# Altium PCB djb_v2_rigid_left.PcbDoc
Units mil, origin at the board's own origin, x right, y up, seen from the top; angles counter-clockwise.
Board outline 1141.73 x 575.79 mil, 4 copper layers (Top Layer, Inner 1, Inner 2, Bottom Layer), stack 23.234 mil thick; 69 components, 44 nets, 250 pads, 92 vias.
Unrouted connection lines stored in the file: 12.
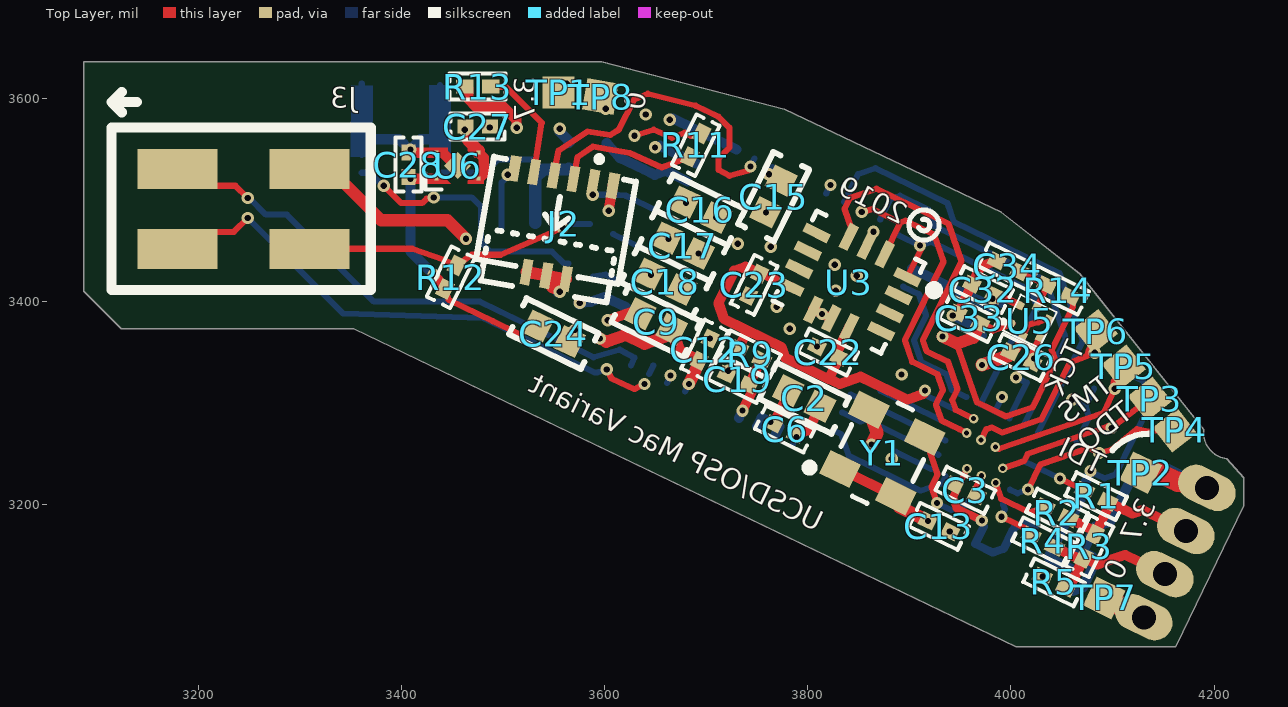
[diagram p0: Top Layer view]
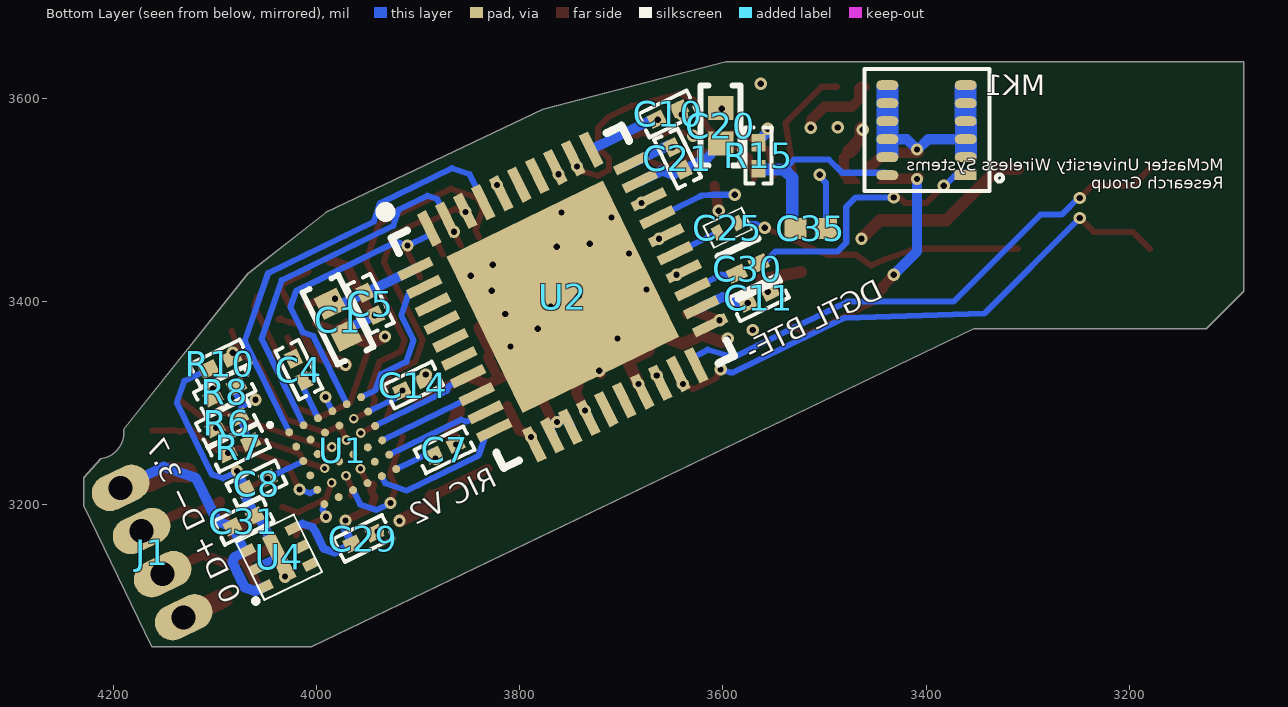
[diagram p1: Bottom Layer view, seen from below]
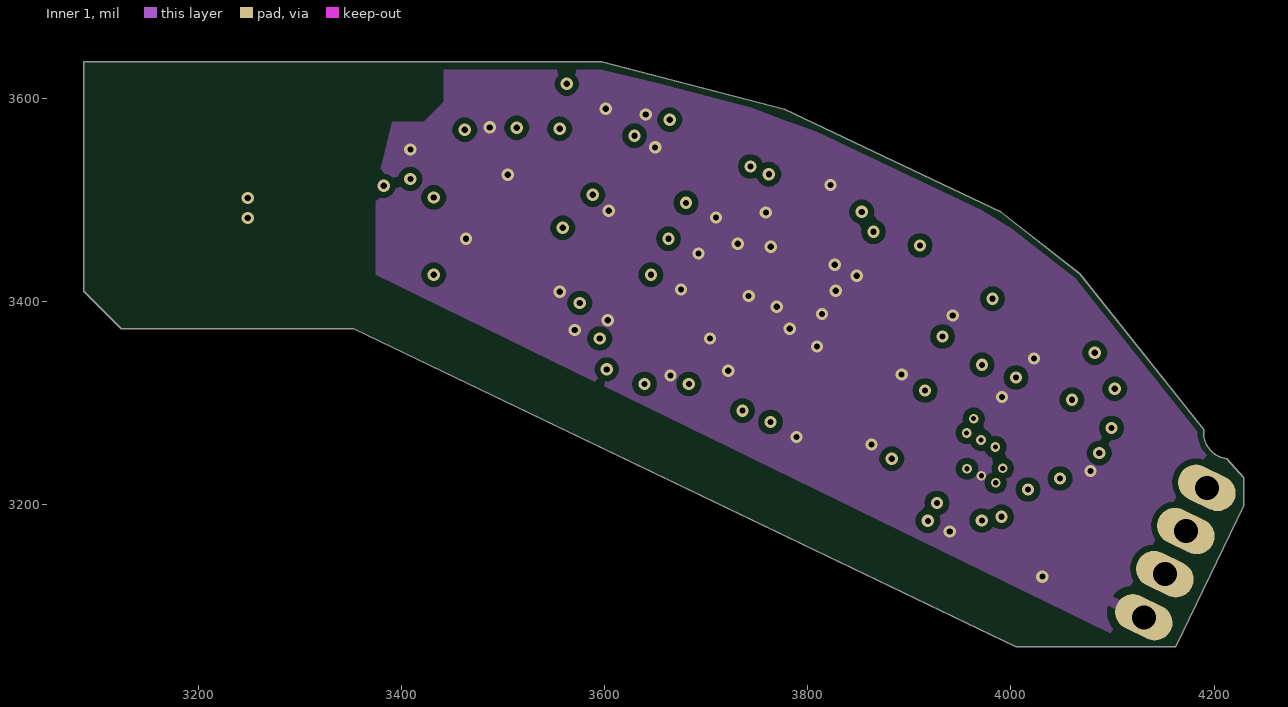
[diagram p2: Inner 1]
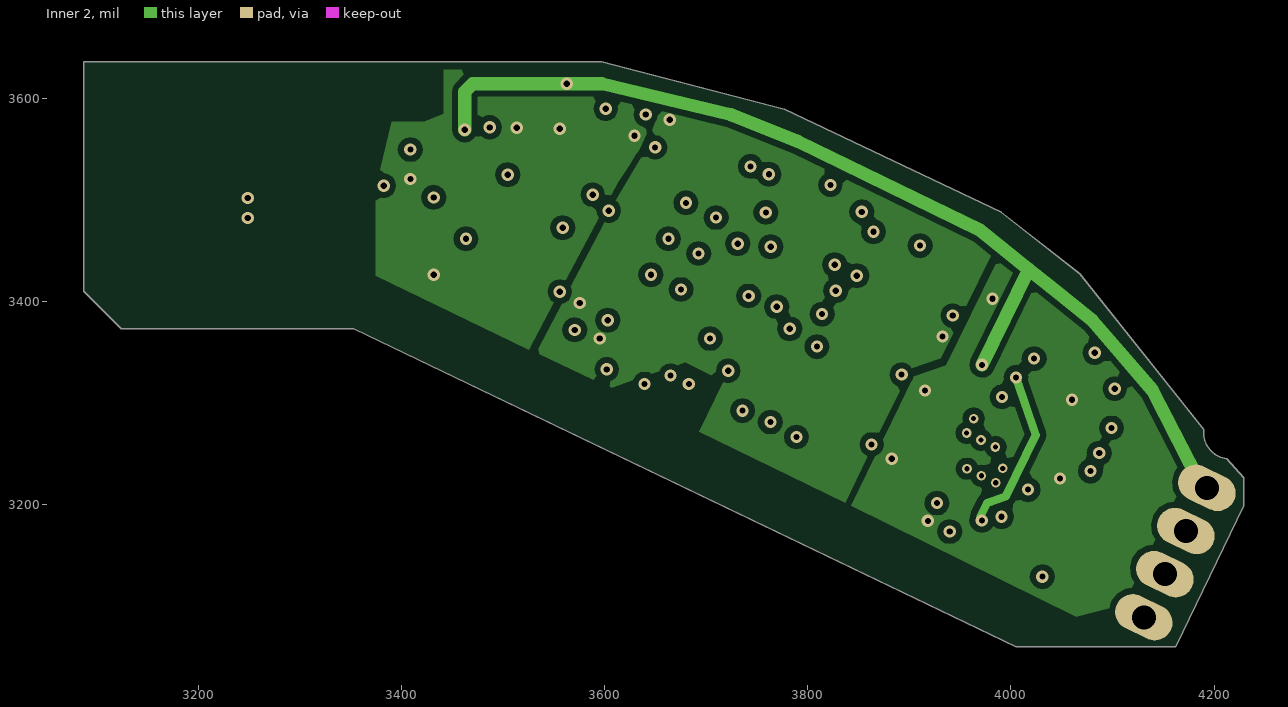
[diagram p3: Inner 2]

## Layer stack, top to bottom
Top Solder: solder mask 0.4, Solder Resist, Dk 3.5
Top Layer: signal copper 1.4
Dielectric 1: prepreg 2.8, PP-006, Dk 4.1
Inner 1: signal copper 1.4169
Dielectric 3: core 12, Core-029, Dk 4.7
Inner 2: signal copper 1.4169
Dielectric 2: prepreg 2.8, PP-006, Dk 4.1
Bottom Layer: signal copper 1.4
Bottom Solder: solder mask 0.4, Solder Resist, Dk 3.5

## Board outline
4229.18,3198.81 4229.18,3226.37 4212.45,3245.07 cw(c4215.52,3270.64) 4189.94,3273.72 4067.76,3427.15 3990.75,3487.49 3777.07,3588.89 3597.17,3635.81 3087.45,3635.81 3087.45,3409.86 3124.29,3373.02 3353.2,3373.02 4005.07,3060.03 4162.25,3060.03

## Design rules (kind name [scope] priority, off if disabled: settings)
BoardOutlineClearance BoardOutlineClearance_Silk [OnLayer('Top Overlay') Or OnLayer('Bottom Overlay')] p1: gap=0 ignorepadtopadclearanceinfootprint=FALSE
BoardOutlineClearance BoardOutlineClearance_Normal [All] p2: gap=6 ignorepadtopadclearanceinfootprint=FALSE
Clearance [All] p1: gap=6 ignorepadtopadclearanceinfootprint=FALSE
ComponentClearance [All] p1: gap=0 collisioncheckmode=3 verticalgap=0 showdistances=FALSE
DiffPairsRouting [All] p1: maxlimit=10 minlimit=6 mostfreqgap=10 toplayer_minwidth=6 toplayer_maxwidth=15 toplayer_prefwidth=10 midlayer1_minwidth=6 midlayer1_maxwidth=15 midlayer1_prefwidth=10 midlayer2_minwidth=6 midlayer2_maxwidth=15 midlayer2_prefwidth=10 bottomlayer_minwidth=6 bottomlayer_maxwidth=15 bottomlayer_prefwidth=10 maxuncoupledlength=500
MinimumSolderMaskSliver [All] p1: minsoldermaskwidth=3
PasteMaskExpansion [All] p1 off: expansion=0
PlaneClearance [All] p1: clearance=10
PlaneConnect PlaneConnect_Via [IsVia] p1: planeconnectstyle=Direct reliefexpansion=10 reliefentries=4 reliefconductorwidth=10 reliefairgap=8
PlaneConnect PlaneConnect_Normal [All] p2: pad.planeconnectstyle=Relief pad.reliefexpansion=10 pad.reliefentries=4 pad.reliefconductorwidth=10 pad.reliefairgap=8 via.planeconnectstyle=Direct via.reliefexpansion=10 via.reliefentries=4 via.reliefconductorwidth=10 via.reliefairgap=8
PolygonConnect PolygonConnect_Normal [All] p1: thpad.connectstyle=Relief thpad.reliefconductorwidth=10 thpad.reliefentries=4 thpad.polygonreliefangle="90 Angle" thpad.airgapwidth=8 smdpad.connectstyle=Relief smdpad.reliefconductorwidth=10 smdpad.reliefentries=4 smdpad.polygonreliefangle="90 Angle" smdpad.airgapwidth=8 via.connectstyle=Direct via.reliefconductorwidth=10 via.reliefentries=4 via.polygonreliefangle="90 Angle" via.airgapwidth=10
RoutingVias [All] p1: holewidth=6 width=12 viastyle="Through Hole" minholewidth=5 minwidth=9.5 maxholewidth=50 maxwidth=100
SilkToSilkClearance [All] p1: silktosilkclearance=-1000
SilkToSolderMaskClearance [IsPad] p1: minsilkscreentomaskgap=-1000 clearancetoexposedcopper=TRUE
SolderMaskExpansion [All] p1 off: expansion=4 istentingtop=FALSE
Width [All] p1: maxlimit=100 minlimit=6 preferedwidth=6
22 further rules are at their usual default settings.

## Components (designator, comment, footprint, x,y, rotation, side; value= is the part's Value field where it differs from the comment)
C1 "10uF" "CAP 0402/1005" 3978.89,3381.9 r64 bottom
C2 "10uF" "CAP 0402/1005" 3796.53,3304.39 r154 top
C3 "0.10uF" "CAP 0201/0603" 3955.28,3214.05 r334 top
C4 "0.10uF" "CAP 0201/0603" 4017.49,3332.63 r244 bottom
C5 "0.10uF" "CAP 0201/0603" 3947.04,3397.44 r244 bottom
C6 "0.10uF" "CAP 0201/0603" 3777.46,3274.27 r334 top
C7 "0.10uF" "CAP 0201/0603" 3873.89,3253.74 r154 bottom
C8 "0.10uF" "CAP 0201/0603" 4059.1,3220.36 r154 bottom
C9 "10uF" "CAP 0402/1005" 3650.79,3380.08 r154 top
C10 "0.10uF" "CAP 0201/0603" 3654.05,3584.36 r334 bottom
C11 "0.10uF" "CAP 0201/0603" 3564.57,3403.53 r334 bottom
C12 "0.10uF" "CAP 0201/0603" 3698.6,3352.38 r244 top
C13 "0.10uF" "CAP 0201/0603" 3929.21,3178.58 r154 top
C14 "0.10uF" "CAP 0201/0603" 3904.95,3317.44 r154 bottom
C15 "10uF" "CAP 0402/1005" 3766.4,3503.06 r244 top
C16 "10uF" "CAP 0402/1005" 3694.34,3490.02 r334 top
C17 "10uF" "CAP 0402/1005" 3677.08,3454.64 r334 top
C18 "10uF" "CAP 0402/1005" 3659.82,3419.25 r334 top
C19 "1uF" "CAP 0201/0603" 3731.2,3323.11 r334 top
C20 "10uF" "CAP 0402/1005" 3602.24,3572.82 r90 bottom
C21 "0.10uF" "CAP 0201/0603" 3644.54,3540.6 r244 bottom
C22 "0.10uF" "CAP 0201/0603" 3820.12,3350.06 r334 top
C23 "0.10uF" "CAP 0201/0603" 3747.27,3416.25 r64 top
C24 "10uF" "CAP 0402/1005" 3550.05,3368.1 r154 top
C25 "CL03A105KQ3CSNH" CL03A105KQ3CSNH 3595.32,3472.43 r334 bottom
C26 "1uF" "CAP 0201/0603" 4010.33,3344.89 r154 top
C27 "1uF" "CAP 0201/0603" 3475.24,3572.04 r180 top
C28 "1uF" "CAP 0201/0603" 3407.05,3534.44 r270 top
C29 "1uF" "CAP 0201/0603" 3953.98,3166.5 r334 bottom
C30 "GRM033R60J155ME14D" FP-GRM033-0_03-IPC_B 3575.54,3432.21 r155 bottom
C31 "1uF" "CAP 0201/0603" 4071.79,3183.5 r334 bottom
C32 "1uF" "CAP 0201/0603" 3972.7,3411.43 r334 top
C33 "1uF" "CAP 0201/0603" 3958.89,3383.12 r334 top
C34 "1uF" "CAP 0201/0603" 3997.12,3434.56 r334 top
C35 "CL03A104KQ3NNNC" CAPC0603X33X15ML03T05 3513.63,3471.7 r0 bottom
J1 "PIGTAIL" PIGTAIL 4161.89,3152.7 r64 bottom
J2 "FFC" HIROSE_FH58M-7S-0.25SHW-99 3554.97,3495.07 r350 top
J3 "M22-6550242R" M22-6550242R 3244.93,3491.08 r270 top
MK1 "VA1200AA" VA1200AA 3438.24,3524.11 r180 bottom
R1 "2k" "RES 0201/0603" 4083.87,3208.27 r154 top
R2 "100" "RES 0201/0603" 4045.29,3192.05 r154 top
R3 "115" "RES 0201/0603" 4077.31,3158.91 r64 top
R4 "100" "RES 0201/0603" 4031.49,3163.74 r154 top
R5 "2k" "RES 0201/0603" 4042.45,3123.35 r334 top
R6 "4.7k" "RES 0201/0603" 4088.44,3280.51 r154 bottom
R7 "4.7k" "RES 0201/0603" 4076.36,3255.74 r154 bottom
R8 "4.7k" "RES 0201/0603" 4090.4,3311.01 r154 bottom
R9 "1k" "RES 0201/0603" 3743.28,3347.88 r334 top
R10 "2.2k" "RES 0201/0603" 4094.91,3338.68 r154 bottom
R11 "1k" "RES 0201/0603" 3689.81,3553.68 r64 top
R12 "1k" "RES 0201/0603" 3448.67,3423.68 r244 top
R13 "1k" "RES 0201/0603" 3475.24,3611.21 r180 top
R14 "3k" "RES 0201/0603" 4046.66,3410.4 r154 top
R15 "1k" "RES 0201/0603" 3564.81,3543.29 r270 bottom
TP1 "TP_SMD_DJB" TP_SMD_DJB#1 3554.97,3605.3 r90 top
TP2 "TP_SMD_DJB" TP_SMD_DJB#1 4127.8,3231.29 r64 top
TP3 "TP_SMD_DJB" TP_SMD_DJB#2 4136.66,3304.12 r64 top
TP4 "TP_SMD_DJB" TP_SMD_DJB#2 4161.27,3272.98 r64 top
TP5 "TP_SMD_DJB" TP_SMD_DJB#2 4111.07,3335.62 r64 top
TP6 "TP_SMD_DJB" TP_SMD_DJB#2 4083.51,3370.6 r64 top
TP7 "TP_SMD_DJB" TP_SMD_DJB#1 4091.9,3107.99 r64 top
TP8 "TP_SMD_DJB" TP_SMD_DJB#3 3596.31,3601.37 r90 top
U1 "LCMXO3LF-1300E-XUWG36" BGA36_WLCS_25X25_MACHXO3 3974.26,3252.97 r244 bottom
U2 "ADAU1372" QFN40_LFCSP_WQ_6mmx6mm 3757.69,3404.37 r244 bottom
U3 "BMI160" LGA14R50P5X4_300X250X83 3840.57,3418.93 r154 top
U4 "MIC5367 LDO 1.2V" "LDO 1.2V" 4036.92,3147.95 r64 bottom
U5 "MIC5380/1-xxYFT" "06L FCSTSLP" 4018.79,3380.19 r334 top
U6 "MIC5504-1.8YMT" MICREL_DFN4 3455.56,3533.45 r90 top
Y1 "12.288 MHz" OSC_2.5X2.0MM 3831.82,3234.84 r64 top

## Footprints (in the part's own frame and the unit in brackets; to place one, negate y for a bottom-side part, rotate by r counter-clockwise, add the part's x,y. Pads: shape width x height; smd on the part's side, far side on the other; paste and mask are expansions set on the pad)
"06L FCSTSLP" [mm] "6-Pin 1mm x 1mm Thin MLF®   (FT)"
  oct 0.2x0.2 smd mask+0.01: 1(-0.4,-0.25)
  rect 0.2x0.2 smd mask+0.01: 2(-0.4,0.25) 3(0,0.4) 4(0.4,0.25) 5(0.4,-0.25) 6(0,-0.4)
  silkscreen extent -0.65,-0.5 0.5,0.5, body extent -0.5,-0.5 0.5,0.5, height 0.5
BGA36_WLCS_25X25_MACHXO3 [mm] "Lattice MachXO3 WLCSP36"
  round 0.2 smd: A1(-1,-1) A2(-0.6,-1) A3(-0.2,-1) A4(0.2,-1) A5(0.6,-1) A6(1,-1) B1(-1,-0.6) B2(-0.6,-0.6) B3(-0.2,-0.6) B4(0.2,-0.6) B5(0.6,-0.6) B6(1,-0.6) C1(-1,-0.2) C2(-0.6,-0.2) C3(-0.2,-0.2) C4(0.2,-0.2) C5(0.6,-0.2) C6(1,-0.2) D1(-1,0.2) D2(-0.6,0.2) D3(-0.2,0.2) D4(0.2,0.2) D5(0.6,0.2) D6(1,0.2) E1(-1,0.6) E2(-0.6,0.6) E3(-0.2,0.6) E4(0.2,0.6) E5(0.6,0.6) E6(1,0.6) F1(-1,1) F2(-0.6,1) F3(-0.2,1) F4(0.2,1) F5(0.6,1) F6(1,1)
  silkscreen extent -1.42,-1.4 -1.33,-1.3, body extent -1.27,-1.24 1.27,1.24, height 0.58
"CAP 0201/0603" [mm] "Chip Capacitor, 2-Leads, Body 0.60x0.30mm, IPC Medium Density"
  rect 0.4x0.35 smd: 1(-0.31,0) 2(0.31,0)
  silkscreen extent -0.68,-0.33 0.68,0.33, body extent -0.3,-0.15 0.3,0.15
"CAP 0402/1005" [mm] "Chip Capacitor, 2-Leads, Body 1.02x0.51mm, IPC Medium Density"
  rect 0.6x0.64 smd: 1(-0.44,0) 2(0.44,0)
  silkscreen extent -1,-0.5 1,0.5, body extent -0.5,-0.26 0.5,0.26
CAPC0603X33X15ML03T05 [mm] "Chip Capacitor, 2-Leads, Body 0.60x0.30mm, IPC Low Density"
  rect 0.56x0.52 smd: 1(-0.38,0) 2(0.38,0)
  body extent -0.32,-0.17 0.32,0.17, height 0.33
CL03A105KQ3CSNH [mm]
  rect 0.25x0.35 smd mask+0.05: 1(-0.275,0) 2(0.275,0)
  silkscreen extent -0.53,-0.3 0.52,0.3, body extent -0.3,-0.15 0.3,0.15, height 0.3
FP-GRM033-0_03-IPC_B [mil]
  rect 17.88x14.28 smd paste+0 mask+0: 1(-11.98,0) 2(11.98,0)
  silkscreen extent -21,-23 21,23, body extent -12,-6 12,6, height 13
HIROSE_FH58M-7S-0.25SHW-99 [mm] "Hirose FH58M-7S-0.25SHW(99) Top+Bottom Contacts 7-pin FFC Connector"
  rect 0.25x0.65 smd: 1(0.75,0.7) 2(0.5,-1.8) 3(0.25,0.7) 4(0,-1.8) 5(-0.25,0.7) 6(-0.5,-1.8) 7(-0.75,0.7)
  rect 0.27x0.65 smd: S(-1.25,0.7) S(1.25,0.7)
  silkscreen extent -1.8,-2.2 1.8,1.32, body extent -1.75,-2.19 1.75,0.91, height 0.9
"LDO 1.2V" [mm] "6-Pin 1.6mmx1.6mm Thin MLF (MT)"
  rect 0.25x0.35 smd mask+0.01: 1(-0.5,0.625) 2(0,0.625) 3(0.5,0.625) 4(0.5,-0.625) 5(0,-0.625) 6(-0.5,-0.625)
  rect 1.26x0.35 smd mask+0.01: 7(0,0)
  silkscreen extent -0.8,-0.8 0.8,1.06, body extent -0.8,-0.8 0.8,0.8, height 0.8
LGA14R50P5X4_300X250X83 [mm]
  rect 0.675x0.25 smd: 1(-1.262,-0.75) 2(-1.263,-0.25) 3(-1.263,0.25) 4(-1.262,0.75) 8(1.262,0.75) 9(1.262,0.25) 10(1.263,-0.25) 11(1.262,-0.75)
  rect 0.25x0.675 smd: 5(-0.5,1.013) 6(0,1.013) 7(0.5,1.013) 12(0.5,-1.013) 13(0,-1.013) 14(-0.5,-1.012)
  silkscreen extent -2.1,-1.25 1.5,1.25, body extent -1.52,-1.27 1.52,1.27, height 0.83
M22-6550242R [mm] "4 Position Receptacle Connector 0.079\" (2.00mm) Surface Mount, Right Angle Gold"
  rect 1x2 smd: 1(-1,-1.65) 2(1,-1.65) 3(1,1.65) 4(-1,1.65)
  silkscreen extent -2.92,-3.3 2.03,3.18, body extent -2.15,-16.26 2.15,-3.81, height 4.01
MICREL_DFN4 [mm] "Micrel DFN-4 from MIC5504-1.8YMT datasheet"
  rect 0.1x0.1 smd: 1(-0.325,0.525) 2(0.325,0.525) 3(0.325,-0.525) 4(-0.325,-0.525)
  rect 0.48x0.48 smd rot 135: EP(0,0)
  Top Layer region: -0.45,0.18 -0.45,0.65 -0.2,0.65 -0.2,0.43
  Top Layer region: 0.45,0.65 0.2,0.65 0.2,0.43 0.38,0.25 0.45,0.25
  Top Layer region: -0.45,-0.65 -0.2,-0.65 -0.2,-0.43 -0.38,-0.25 -0.45,-0.25
  Top Layer region: 0.45,-0.65 0.2,-0.65 0.2,-0.43 0.38,-0.25 0.45,-0.25
  silkscreen extent -0.6,0.4 -0.2,0.8, body extent -0.5,-0.5 0.5,0.5, height 0.57
OSC_2.5X2.0MM [mm] "SMD MEMS oscillator, 2.5x2.0 mm"
  rect 0.65x0.85 smd: 1(0,0) 2(1.65,0) 3(1.65,-1.55) 4(0,-1.55)
  silkscreen extent -0.48,-1.77 2.13,0.8, body extent -0.48,-1.8 2.13,0.25, height 0.86
PIGTAIL [mm] "PIGTAIL"
  oval 0.9x1.5 hole 0.6: 1(1.8,0) 2(0.6,0) 3(-0.6,0) 4(-1.8,0)
QFN40_LFCSP_WQ_6mmx6mm [mm] "QFN, 40-Leads, Body 6.00x6.00mm, Pitch 0.50mm, Thermal Pad 4.35x4.35mm, IPC Medium Density"
  rect 0.9x0.25 smd: 1(-3,-2.25) 2(-3,-1.75) 3(-3,-1.25) 4(-3,-0.75) 5(-3,-0.25) 6(-3,0.25) 7(-3,0.75) 8(-3,1.25) 9(-3,1.75) 10(-3,2.25) 21(3,2.25) 22(3,1.75) 23(3,1.25) 24(3,0.75) 25(3,0.25) 26(3,-0.25) 27(3,-0.75) 28(3,-1.25) 29(3,-1.75) 30(3,-2.25)
  rect 0.25x0.9 smd: 11(-2.25,3) 12(-1.75,3) 13(-1.25,3) 14(-0.75,3) 15(-0.25,3) 16(0.25,3) 17(0.75,3) 18(1.25,3) 19(1.75,3) 20(2.25,3) 31(2.25,-3) 32(1.75,-3) 33(1.25,-3) 34(0.75,-3) 35(0.25,-3) 36(-0.25,-3) 37(-0.75,-3) 38(-1.25,-3) 39(-1.75,-3) 40(-2.25,-3)
  rect 4.35x4.35 smd: 41(0,0)
  silkscreen extent -3.97,-3.2 3.2,3.2, body extent -3.07,-3.07 3.07,3.07, height 0.8
"RES 0201/0603" [mm] "Chip Resistor, 2-Leads, Body 0.60x0.30mm, IPC Medium Density"
  rect 0.44x0.35 smd: 1(-0.325,0) 2(0.325,0)
  silkscreen extent -0.7,-0.33 0.7,0.33, body extent -0.3,-0.15 0.3,0.15
TP_SMD_DJB#1 [mm] "DJB style SMD test point"
  rect 0.8x0.8 smd paste-1000: 1(0,0)
TP_SMD_DJB#2 [mm] "DJB style SMD test point"
  rect 0.8x0.8 smd rot 64 paste-1000: 1(0,0)
TP_SMD_DJB#3 [mm] "DJB style SMD test point"
  rect 0.8x0.8 smd rot 80 paste-1000: 1(0,0)
VA1200AA [mm]
  rect 0.55x0.25 smd mask+0.07: 1(1.96,0)
  oval 0.55x0.25 smd mask+0.07: 2(1.96,0.45) 3(1.96,0.9) 4(1.96,1.35) 5(1.96,1.8) 6(1.96,2.25) 7(0,2.25) 8(0,1.8) 9(0,1.35) 10(0,0.9) 11(0,0.45) 12(0,0)
  silkscreen extent -0.58,-0.4 2.89,2.65, body extent 0.1,-0.25 1.95,2.5, height 0.05

## Part data
C1 C2 C9 C15 C16 C17 C18 C20 C24: library part C1005X5R0J106M050BC, "CAP CER 10UF 6.3V X5R 0402", Device Package="0402 (1005 Metric)", Manufacturer="TDK Corporation", Supplier Part Number 1=445-8920-2-ND, TemperatureCoefficient=X5R, TemperatureRange="-55C ~ 85C", Tolerance=20%, Voltage=6.3V, ComponentLink1Description=Datasheet, ComponentLink1URL=https://product.tdk.com/info/en/catalog/datasheets/mlcc_commercial_general_en.pdf, ComponentLink2Description="Digi-Key Listing", ComponentLink2URL=https://www.digikey.com/product-detail/en/tdk-corporation/C1005X5R0J106M050BC/445-8920-2-ND/3507809, PartId=12380, Part Number=C1005X5R0J106M050BC, Price=0.119, Supplier 1=Digi-Key
C3 C4 C5 C6 C7 C8 C10 C11 C12 C13 C14 C21 C22 C23: library part CL03A104KP3NNNC, "CAP CER 0.1UF 10V X5R 0201", Device Package="0201 (0603 Metric)", Manufacturer="Samsung Electro-Mechanics America, Inc.", Supplier Part Number 1=1276-1115-2-ND, TemperatureCoefficient=X5R, TemperatureRange="-55C ~ 85C", Tolerance=10%, Voltage=10V, ComponentLink1Description=Datasheet, ComponentLink1URL=http://www.samsungsem.com/kr/support/product-search/mlcc/__icsFiles/afieldfile/2016/08/18/S_CL03A104KP3NNND.pdf, ComponentLink2Description="Digi-Key Listing", ComponentLink2URL=https://www.digikey.com/product-detail/en/samsung-electro-mechanics-america-inc/CL03A104KP3NNNC/1276-1115-2-ND/3886773, PartId=20562, Part Number=CL03A104KP3NNNC, Price=0.0031, Supplier 1=Digi-Key
C19 C26 C27 C28 C29 C31 C32 C33 C34: library part 02016D105MAT2A, "CAP CER 1UF 6.3V X5R 0201", Device Package="0201 (0603 Metric)", Manufacturer="AVX Corporation", Supplier Part Number 1=478-7862-2-ND, TemperatureCoefficient=X5R, TemperatureRange="-55C ~ 85C", Tolerance=20%, Voltage=6.3V, ComponentLink1Description=Datasheet, ComponentLink1URL=http://datasheets.avx.com/cx5r.pdf, ComponentLink2Description="Digi-Key Listing", ComponentLink2URL=https://www.digikey.com/product-detail/en/avx-corporation/02016D105MAT2A/478-7862-2-ND/3079664, PartId=20442, Part Number=02016D105MAT2A, Price=0.063, Supplier 1=Digi-Key
C25: "1 µF ±10% 6.3V Ceramic Capacitor X5R 0201 (0603 Metric)", Supplier Part Number 1=1276-6440-1-ND, Supplier 1=Digi-Key
C30: library part CMP-06035-017352-1, "Chip Multilayer Ceramic Capacitors for General Purpose, 0201, 1.5uF, X5R, 15%, 20%, 6.3V", Capacitance=1.5uF, Case Code (Imperial)=0201, Case Code (Metric)=0603, Dielectric=X5R, Max Operating Temperature=85°C, Min Operating Temperature=-55°C, Tolerance=20%, Voltage Rating=6.3V, Case/Package=0201, Length=0.024inch, Mount="Surface Mount", Packaging="Tape and Reel", Thickness=0.013inch, Voltage Rating (DC)=6.3V, Width=0.012inch
C35: library part CMP-2010-00674-1, Manufacturer=Samsung, Part Number=CL03A104KQ3NNNC
J2: library part HIROSE_FH58M-7S-0.25SHW-99, "Hirose FH58M-7S-0.25SHW(99) 7-pin Top+Bottom Contact FFC Connector"
J3: "4 Position Receptacle Connector 0.079\" (2.00mm) Surface Mount, Right Angle Gold", Supplier Part Number 1=952-3188-1-ND, Supplier 1=Digi-Key
MK1: "Bone Conductor Sensor Accelerometer"
R1 R5: library part RC0201FR-072KL, "RES SMD 2K OHM 1% 1/20W 0201", Device Package="0201 (0603 Metric)", Manufacturer=Yageo, PowerRating="0.05W, 1/20W", Supplier Part Number 1=YAG2280TR-ND, TemperatureCoefficient=200ppm/C, TemperatureRange="-55C ~ 125C", Tolerance=1%, ComponentLink1Description=Datasheet, ComponentLink1URL=http://www.yageo.com/documents/recent/PYu-RC_Group_51_RoHS_L_04.pdf, ComponentLink2Description="Digi-Key Listing", ComponentLink2URL=https://www.digikey.com/product-detail/en/yageo/RC0201FR-072KL/YAG2280TR-ND/3202400, PartId=19505, Part Number=RC0201FR-072KL, Price=0.0042, Supplier 1=Digi-Key
R2 R4: library part RC0603F101CS, "RES SMD 100 OHM 1% 1/20W 0201", Device Package="0201 (0603 Metric)", Manufacturer="Samsung Electro-Mechanics America, Inc.", PowerRating="0.05W, 1/20W", Supplier Part Number 1=1276-3601-2-ND, TemperatureCoefficient=250ppm/C, TemperatureRange="-55C ~ 125C", Tolerance=1%, ComponentLink1Description=Datasheet, ComponentLink1URL=//media.digikey.com/pdf/Data%20Sheets/Samsung%20PDFs/RC_Series_ds.pdf, ComponentLink2Description="Digi-Key Listing", ComponentLink2URL=https://www.digikey.com/product-detail/en/samsung-electro-mechanics-america-inc/RC0603F101CS/1276-3601-2-ND/3963908, PartId=19787, Part Number=RC0603F101CS, Price=0.0081, Supplier 1=Digi-Key
R3: library part RC0201FR-07115RL, "RES SMD 115 OHM 1% 1/20W 0201", Device Package="0201 (0603 Metric)", Manufacturer=Yageo, PowerRating="0.05W, 1/20W", Supplier Part Number 1=YAG2383TR-ND, TemperatureCoefficient=200ppm/C, TemperatureRange="-55C ~ 125C", Tolerance=1%, ComponentLink1Description=Datasheet, ComponentLink1URL=http://www.yageo.com/documents/recent/PYu-RC_Group_51_RoHS_L_04.pdf, ComponentLink2Description="Digi-Key Listing", ComponentLink2URL=https://www.digikey.com/product-detail/en/yageo/RC0201FR-07115RL/YAG2383TR-ND/5280243, PartId=20289, Part Number=RC0201FR-07115RL, Price=0.0042, Supplier 1=Digi-Key
R6 R7 R8: library part RC0201FR-074K7L, "RES SMD 4.7K OHM 1% 1/20W 0201", Device Package="0201 (0603 Metric)", Manufacturer=Yageo, PowerRating="0.05W, 1/20W", Supplier Part Number 1=311-4.70KMTR-ND, TemperatureCoefficient=200ppm/C, TemperatureRange="-55C ~ 125C", Tolerance=1%, ComponentLink1Description=Datasheet, ComponentLink1URL=http://www.yageo.com/documents/recent/PYu-RC_Group_51_RoHS_L_04.pdf, ComponentLink2Description="Digi-Key Listing", ComponentLink2URL=https://www.digikey.com/product-detail/en/yageo/RC0201FR-074K7L/311-4.70KMTR-ND/1948894, PartId=19526, Part Number=RC0201FR-074K7L, Price=0.0056, Supplier 1=Digi-Key
R9 R11 R12 R13 R15: library part RC0201JR-071KL, "RES SMD 1K OHM 5% 1/20W 0201", Device Package="0201 (0603 Metric)", Manufacturer=Yageo, PowerRating="0.05W, 1/20W", Supplier Part Number 1=311-1KNTR-ND, TemperatureCoefficient=200ppm/C, TemperatureRange="-55C ~ 125C", Tolerance=5%, ComponentLink1Description=Datasheet, ComponentLink1URL=http://www.yageo.com/documents/recent/PYu-RC_Group_51_RoHS_L_04.pdf, ComponentLink2Description="Digi-Key Listing", ComponentLink2URL=https://www.digikey.com/product-detail/en/yageo/RC0201JR-071KL/311-1KNTR-ND/1948922, PartId=19463, Part Number=RC0201JR-071KL, Price=0.0042, Supplier 1=Digi-Key
R10: library part RC0603F222CS, "RES SMD 2.2K OHM 1% 1/20W 0201", Device Package="0201 (0603 Metric)", Manufacturer="Samsung Electro-Mechanics America, Inc.", PowerRating="0.05W, 1/20W", Supplier Part Number 1=1276-3634-2-ND, TemperatureCoefficient=250ppm/C, TemperatureRange="-55C ~ 125C", Tolerance=1%, ComponentLink1Description=Datasheet, ComponentLink1URL=//media.digikey.com/pdf/Data%20Sheets/Samsung%20PDFs/RC_Series_ds.pdf, ComponentLink2Description="Digi-Key Listing", ComponentLink2URL=https://www.digikey.com/product-detail/en/samsung-electro-mechanics-america-inc/RC0603F222CS/1276-3634-2-ND/3963941, PartId=19542, Part Number=RC0603F222CS, Price=0.0019, Supplier 1=Digi-Key
R14: library part RC0201FR-073KL, "RES SMD 3K OHM 1% 1/20W 0201", Device Package="0201 (0603 Metric)", Manufacturer=Yageo, PowerRating="0.05W, 1/20W", Supplier Part Number 1=YAG2656TR-ND, TemperatureCoefficient=200ppm/C, TemperatureRange="-55C ~ 125C", Tolerance=1%, ComponentLink1Description=Datasheet, ComponentLink1URL=http://www.yageo.com/documents/recent/PYu-RC_Group_51_RoHS_L_04.pdf, ComponentLink2Description="Digi-Key Listing", ComponentLink2URL=https://www.digikey.com/product-detail/en/yageo/RC0201FR-073KL/YAG2656TR-ND/5280516, PartId=19520, Part Number=RC0201FR-073KL, Price=0.0042, Supplier 1=Digi-Key
TP1 TP2 TP3 TP4 TP5 TP6 TP7 TP8: "Digital Jellybean Style SMD Test Point", DNP=DNP
U1: "Lattice MachXO3 36-ball 2.5x2.5mm FPGA"
U2: "Analog Devices CODEC"
U3: library part BMI160_1, "BMI160 2.5 x 3 mm Tiaxial Accelerometer / Gyroscope Inertial Measurement Unit", Package="LGA-14 Bosch", Availability=Good, MF=Bosch, MP=BMI160, Price="3.29 USD"
U4: Supplier Part Number 1=576-3723-6-ND, Supplier 1=Digi-Key
U5: "LDO 2fixed Outputs", Supplier Part Number 1=576-3453-6-ND, Supplier 1=Digi-Key
U6: library part MICREL_MIC5504-1.8YMT, "Micrel MIC5504-1.8YMT 1.8V 300mA LDO"
Y1: library part MC_DSC1033DI2-012.2880, "Microchip 12.288 MHz SMD MEMS Oscillator", DIGIKEY_PN=DSC1033DI2-012.2880-ND

## Via types
v1: diameter 12, hole 6, Top Layer to Bottom Layer, tented both sides, 79 vias
v2: diameter 9.5, hole 5, Top Layer to Bottom Layer, tented both sides, 8 vias
v3: diameter 12.01, hole 5.98, Top Layer to Bottom Layer, 5 vias

## Nets (pads, with @x,y where several pads share a name; then routed paths per layer and width w, separated by ;. In a path a pad name is that pad's centre, name@x,y a point inside that pad or via, vN(x,y) a via of type N, cw(c..) or ccw(c..) an arc to the next point about the centre after c; other vN are vias at no path point)
+1V2_D: C3.1 C4.2 C29.2 U1.C1 U1.D5 U4.4 | length 387.9
  Top Layer w6: C3.1 3950.1,3221.39 v2(3956.83,3235.19)
  Top Layer w8: C3.1 3946.3,3213.61 3943.02,3206.89 3946.65,3196.36 v1(3971.42,3184.28)
  Inner 2 w8: v1(3971.42,3184.28) 3970.06,3188.22 3976.53,3201.49 3994.95,3207.84 4024.55,3268.52 v1(4005.07,3325.12)
  Bottom Layer w6: U1.C1 C4.2@4015.68,3319.94 ; v1(4005.07,3325.12) C4.2
  Bottom Layer w8: v1(3971.42,3184.28) 3973.41,3178.48 C29.2 3982.29,3152.69 3992.82,3156.31 4001.89,3174.9 4002.22,3175.02 4003.51,3177.66 4013.71,3181.17 U4.4
+1V8: C24.2 C28.2 R11.2 R12.2 R13.2 R15.1 U6.1 | length 428.2
  Top Layer w6: R12.2 3446.7,3401.56 3490.31,3380.38 3515.6,3368.1 C24.2 ; v1(3629.62,3562.98) 3648.47,3568.89 3666.36,3561.01 3678.98,3565.93 3684.89,3562.98 R11.2
  Top Layer w10: C28.2 C28.2@3408.62,3520.66 ; v1(3408.92,3520.36) C28.2@3408.62,3520.66 ; v3(3431.94,3426.16) 3431.94,3425.61 3443.06,3414.49 R12.2 ; U6.1 C28.2@3408.62,3520.66 ; R13.2@3460.68,3611.21 R13.2 3464.22,3611.21 3466.11,3609.32 3466.11,3598.69 3473.28,3591.52 3500.44,3591.52 3513.25,3578.72 3513.25,3571.24 v1(3513.63,3570.85)
  Bottom Layer w10: v1(3408.92,3520.36) 3408.92,3449.17 v3(3431.94,3426.16) ; v1(3555.95,3569.87) 3555.95,3566.92 3565.79,3557.07 R15.1
+3V3_A: C9.1 C10.2 C11.2 C12.2 C33.2 R14.1 U2.10 U2.19 U2.24 U5.1 | length 607.6
  Top Layer w6: 3946.81,3358.35 3966.75,3300.44 3995.06,3286.63 4021.38,3295.7 4043.82,3341.7 4040.19,3352.23 4061.33,3395.57 R14.1
  Top Layer w8: C33.2 3981.89,3371.9 U5.1
  Top Layer w12: v1(3595.32,3363.37) 3601.68,3360.23 3621.43,3367.03 3639.52,3358.21 3663.4,3366.43 C9.1 ; C9.1@3663.59,3366.82 C9.1 ; v1(3683.01,3318.62) 3693.61,3340.35 C12.2 3673.79,3350.9 C9.1 ; v1(3932.66,3365.25) 3946.81,3358.35 3963.13,3363.97 C33.2
  Bottom Layer w6: U2.24 v1(3683.01,3318.62)
  Bottom Layer w10: v1(3575.64,3398.29) 3586.46,3399.59 3600.24,3404.37 U2.19 ; C10.2 3667.39,3579.82 U2.10
  Bottom Layer w12: C11.2 v1(3575.64,3398.29)
  other v1: 3664.22,3578.73
+3V3_D: C1.2 C5.1 C7.1 C8.2 C13.2 C14.1 C22.2 C23.2 C32.2 R1.2 R6.2 R7.2 R8.2 R9.1 U1.A3 U1.F2 U1.F6 U2.40 U3.5 U3.8 U5.2 Y1.1 Y1.4 | length 884.5
  Top Layer w6: v1(4048.48,3225.53) R1.2
  Top Layer w8: v1(3981.94,3402.54) 3984.57,3403.44 3989.84,3405.26 U5.2
  Top Layer w10: R9.1 3739.72,3369.77 3738.9,3372.15 ; U3.8 3754.73,3427.94 C23.2 3738.82,3433.95 3727.77,3430.14 3712.23,3398.29 3717.67,3382.5 3738.9,3372.15 ; Y1.1 Y1.4 ; U3.5 3829.09,3350.5 C22.2 3820.9,3323.83 ; v1(3915.57,3312.26) 3913.84,3308.72 3898.05,3303.28 3852.05,3325.72 3831.52,3318.65 3820.9,3323.83 ; 3738.9,3372.15 3774.29,3354.89 3777.91,3344.36 3820.38,3323.65 3820.9,3323.83
  Top Layer w13: Y1.4 3890.29,3197.56 v1(3918.24,3183.93)
  Bottom Layer w6: v1(3882.78,3245.03) 3884.5,3248.57 3886.06,3251.75 3886.58,3251.93 U1.F6 ; v1(3915.57,3312.26) 3914.02,3309.08 3914.2,3308.55 U1.F2 ; U1.A3 C8.2 ; v1(4060.04,3303.12) 4073.31,3296.65 ; R7.2@4065.13,3260.56 R7.2 R6.2 4073.31,3296.65 ; R8.2@4081.94,3314.34 4073.31,3296.65
  Bottom Layer w10: U2.40 3951.86,3408.22 C5.1 3978.57,3395.63 3979.64,3395.12 3983.98,3396.61 C1.2 3989.91,3398.65 3987.61,3399.78 v1(3981.94,3402.54)
+3V7: C26.2 C27.2 C31.2 J1.1 TP1.1 TP2.1 U4.1 U4.3 U5.4 U5.6 U6.3 U6.4 | length 1486.5
  Top Layer w6: U5.6 4017.06,3376.65 4026.08,3379.76 4026.91,3379.35 4033.96,3381.78 4034.36,3382.61 4035.49,3382.99 U5.4
  Top Layer w8: C26.2 4005.15,3352.23 U5.6
  Top Layer w10: C27.2 3463.82,3572.04 3465.71,3570.15 3465.71,3558.73 ; U6.4 3481.15,3525.58 3481.15,3541.33 U6.3 3476.23,3548.22
  Top Layer w12: 3465.71,3558.73 3476.23,3548.22
  Top Layer w13: v1(3971.67,3337.46) 3997.46,3346.35 C26.2
  Top Layer w20: TP2.1 4142.57,3232.27 4164.22,3222.43 J1.1
  Inner 2 w13: v1(3462.45,3568.89) 3462.45,3606.19 3470.42,3614.16 3597.56,3614.16 3724.6,3583.65 3789.9,3557.53 3970.36,3469.51 4016.74,3432.12 ; v1(3971.67,3337.46) 4017.19,3430.81 4016.74,3432.12 ; J1.1@4189.45,3214.6 4139.18,3312.71 4080.41,3380.8 4039.53,3413.75 4016.74,3432.12
  Bottom Layer w10: U4.1 4060.14,3114.72 4070.67,3118.34 4082.75,3143.11 4080.94,3148.38 U4.3 4072.14,3156.39 C31.2 4097.76,3183.32 4118.64,3226.13 4150.49,3237.1 J1.1 ; J1.1@4193.78,3222.56 J1.1@4196.41,3223.47
  other v1: 3562.84,3614.16
BCLK: U1.F5 U2.32 | length 105.3
  Bottom Layer w6: U2.32 3852.22,3281.61 3857.75,3283.52 U1.F5
CCLK: U1.F1 U2.39 | length 149
  Bottom Layer w6: U2.39 3909.44,3407.01 3916.6,3386.22 3904.52,3361.45 3911.77,3340.4 3936.54,3328.31 3941.98,3312.52 U1.F1
CS_C: U1.A1 U2.4 | length 433.1
  Bottom Layer w6: U2.4 3849.38,3525.01 3866.83,3531.02 3937.5,3496.56 3943.74,3478.43 4047.76,3427.69 4070.74,3360.97 U1.A1
CS_I: U1.E2 U3.12 | length 378.9
  Top Layer w6: U3.12 3843.58,3470.02 3836.33,3491.08 3841.51,3501.69 3867.83,3510.76 3938.6,3476.24 3951.29,3439.39 3913.32,3361.54 3916.95,3351.01 3938.18,3340.66 3947.53,3313.52 3942.35,3302.9 3945.69,3293.19 v2(3963.38,3284.56)
DMIC: U1.F3 U2.34 | length 105.1
  Bottom Layer w6: U2.34 3869.84,3316.82 3871.56,3311.83 U1.F3
DSPK: U1.F4 U2.33 | length 103.6
  Bottom Layer w6: U2.33 3935.15,3263.06 U1.F4
GND: C1.1 C2.1 C3.2 C4.1 C5.2 C6.2 C7.2 C8.1 C9.2 C10.1 C11.1 C12.1 C13.1 C14.2 C15.2 C16.2 C17.2 C18.2 C19.1 C20.2 C21.1 C22.1 C23.1 C24.1 C26.1 C27.1 C28.1 C29.1 C31.1 C32.1 C33.1 C34.1 C35.1 J1.4 J2.2 J2.4 J2.6 J2.S J3.4 MK1.2 MK1.3 MK1.4 MK1.5 MK1.6 MK1.7 MK1.8 MK1.9 MK1.10 MK1.11 R5.1 R10.1 TP7.1 TP8.1 U1.C5 U1.D1 U2.5 U2.11 U2.20 U2.23 U2.30 U2.41 U3.6 U3.7 U4.2 U4.7 U5.5 U6.2 U6.EP Y1.2 | length 1319.7
  Top Layer w6: C3.2 3964.25,3214.49 v2(3970.98,3228.29) ; C26.1 4019.2,3346.02 U5.5
  Top Layer w10: C28.1 3408.92,3548.52 v1(3408.92,3549.36) ; C28.1@3408.92,3546.26 C28.1@3408.92,3546.64 ; C28.1@3408.94,3546.25 U6.2 3438.83,3546.25 ; 3440.79,3546.25 3453.59,3533.45 U6.EP ; v1(3487.05,3571.25) 3487.45,3571.64 C27.1 ; J2.4 3548.08,3413.37 3555.86,3409.48 v1(3555.95,3409.44) 3553.35,3419.65 3552.36,3423.57 ; v1(3603.23,3381.37) 3629.55,3390.44 C9.2 ; v1(3604.18,3489.16) J2.S@3608.22,3513.66 ; C19.1 v1(3721.78,3331.65) ; C6.2 3800.54,3273.09 C2.1 ; U3.7 v1(3814.25,3387.41) U3.6 ; C33.1 C32.1 3970.36,3434.47 C34.1
  Top Layer w12: J3.4 3329.57,3530.45 3380.21,3479.81 3445.38,3479.81 v1(3463.65,3461.54) ; J2.6 J2.4 3552.36,3423.57 J2.2
  Top Layer w13: Y1.2 3868.27,3270.06 v1(3862.92,3259.09)
  Top Layer w20: TP7.1 J1.4
  Bottom Layer w6: MK1.2@3361.07,3544.28 MK1.3 MK1.4 MK1.5@3361.07,3597.43 ; MK1.5 MK1.6@3361.07,3614.46 ; v1@3408.06,3549.36 v1(3408.92,3549.36) ; MK1.11@3438.24,3544.28 MK1.7 ; C35.1 3498.67,3516.87 3504.77,3522.97 v1(3504.77,3524.59) ; v1(3603.23,3381.37) 3612.61,3376.8 U2.20 ; U2.23 v1(3665.13,3326.87) ; U2.30 v1(3788.98,3266.46) ; U2.5 v1(3822.37,3514.53) ; U1.D1 v1(3991.35,3305.96) ; v1@4078.53,3232.34 4091.97,3225.79 4103.03,3229.59 4137.54,3300.36 4130.29,3321.42 R10.1
  Bottom Layer w10: MK1.3 3397.88,3559.54 v1@3408.06,3549.36 ; v1(3408.92,3549.36) 3419.1,3559.54 MK1.10 ; C11.1 3554.16,3409.44 v1(3555.95,3409.44) ; C21.1@3654.63,3553.2 U2.11 ; v1(3721.78,3331.65) U2.41@3722.31,3331.83 ; v1(3942.75,3385.95) 3968.94,3373.18 C1.1 ; U4.2 U4.7 4056.08,3187.22 C31.1 4071.52,3210.79 C8.1 v1@4078.53,3232.34
  other v1: 4030.95,3128.96 3939.83,3173.4 4078.34,3232.87 3892.53,3327.88 4022.84,3343.6 3809.15,3355.41 3703.95,3363.35 3570.72,3371.9 3782.33,3373.02 3769.53,3394.67 3741.92,3405.28 3827.61,3410.42 3675.39,3411.66 3848.28,3425.18 3826.62,3436.01 3692.65,3447.04 3763.63,3453.73 3731.15,3456.68 3709.91,3482.43 3758.81,3487.49 3649.89,3551.57 3640.6,3583.85 3601.23,3589.55
LPRE_N: R2.2 U1.B5 | length 63.9
  Top Layer w6: v2(3985.14,3221.39) 3990.57,3205.59 4018,3192.22 R2.2
LPRE_P: R4.2 U1.A6 | length 49.5
  Top Layer w6: v1(3990.75,3187.99) 4018.17,3174.61 R4.2
  Bottom Layer w6: v1(3990.75,3187.99) 3994.2,3195.06 U1.A6
LRCLK: U1.E6 U2.31 | length 140.1
  Bottom Layer w6: U2.31 3833.33,3268.92 3840.49,3248.13 3911.26,3213.61 3932.32,3220.87 U1.E6
LVDS_N: J1.2 R1.1 R2.1 R3.2 | length 152.4
  Top Layer w10: R2.1 4081.56,3174.36 R3.2 4096.73,3198.72 R1.1 4119.25,3191.02 4129.78,3194.64 J1.2
LVDS_P: J1.3 R3.1 R4.1 R5.2 | length 154.7
  Top Layer w10: R4.1 4067.76,3146.05 R3.1 ; R5.2 4057.9,3119.1 R3.1 ; J1.3 4112.61,3150.45 4084.97,3140.94 R3.1
MIC1: J2.5 U2.9 | length 319
  Top Layer w6: J2.5 3554.97,3548.41 3583.32,3567.25 3605.67,3563.77 3614.02,3568.89 3629.13,3598.56 3642.57,3604.32 3689.81,3592.51 3712.23,3581.68 3723.02,3570.89 3723.02,3551.31 3712.32,3540.61 3712.32,3529.37 3723.02,3523.61 3741.76,3528.88 v1(3743.66,3532.78)
  Bottom Layer w6: v1(3743.66,3532.78) U2.9
MIC2: J2.1 U2.14 | length 81
  Bottom Layer w6: v1(3588.43,3504.91) 3609.65,3504.91 3620.21,3504.03 cw(c3619.71,3498.05) 3622.33,3503.45 3651.33,3489.31 U2.14
MIC3: C25.2 U2.16 | length 42.9
  Bottom Layer w6: C25.2@3608.65,3466.11 U2.16
MIC4: C30.1 U2.18 | length 44.9
  Bottom Layer w6: C30.1@3588.58,3424.26 3601.23,3426.17 U2.18
MISO: U1.E1 U2.1 U3.1 | length 309.7
  Top Layer w6: U3.1 3911.78,3451.54 v1(3910.64,3454.83)
  Bottom Layer w6: U2.1@3889.41,3465.19 v1(3910.64,3454.83) 3921.17,3458.46 4020.25,3410.14 4025.69,3394.34 4013.61,3369.57 4003.08,3365.95 U1.E1
MOSI: U1.E3 U2.3 U3.14 | length 357.7
  Top Layer w6: v1(3853.27,3488.08) 3852.21,3487.71 3852.92,3487.37 3853.45,3487.55 3863.45,3490.99 3891.05,3477.53 ; U3.14 3891.05,3477.53 ; v2(3956.48,3270.41) 3949.4,3273.86 3949.34,3274.05 3931.65,3282.68 3926.27,3298.28 3933.18,3312.43 3927.74,3328.23 3902.97,3340.31 3895.72,3361.37 3933.69,3439.21 3924.62,3465.54 3896.32,3479.34 3891.05,3477.53
  Bottom Layer w6: v1(3853.27,3488.08) U2.3
NetC2_2: C2.2 C6.1 U2.28 U2.29 | length 75.3
  Top Layer w10: C6.1 3781.51,3310.41 C2.2
  Bottom Layer w10: U2.28 3754.46,3285.49 v1(3763.31,3281.17) 3772.15,3276.86 U2.29
NetC15_1: C15.1 U2.8 | length 10.7
  Top Layer w6: v1(3761.78,3525.02) C15.1@3762.69,3522.39
  Bottom Layer w6: v1(3761.78,3525.02) U2.8
NetC16_1: C16.1 U2.13 | length 1.6
  Top Layer w6: C16.1 v1(3680.18,3496.93)
NetC17_1: C17.1 U2.15 | length 1.6
  Top Layer w6: C17.1 v1(3662.92,3461.54)
NetC18_1: C18.1 U2.17 | length 1.6
  Top Layer w6: C18.1 v1(3645.67,3426.16)
NetC19_2: C19.2 R9.2 U2.27 | length 63.6
  Top Layer w10: v1(3735.9,3292.35) 3744.71,3310.39 C19.2 3753.99,3342 R9.2
  Bottom Layer w10: U2.27 v1(3735.9,3292.35)
NetC20_1: C20.1 C21.2 U2.12 | length 92.7
  Bottom Layer w10: C20.1 3615.01,3541.33 C21.2 3649.45,3524.62 3660.5,3528.43 U2.12
NetC25_1: C25.1 J3.3 R12.1 | length 288.6
  Top Layer w6: J3.3 3410.81,3451.74 3441.78,3440.93 R12.1 3469.34,3445.85 3497.88,3445.85 v1(3558.91,3472.43)
  Bottom Layer w6: v1(3558.91,3472.43) 3567.94,3476.06 3567.94,3476.27 C25.1@3585.51,3476.27
NetC30_2: C30.2 MK1.1 | length 263.9
  Top Layer w6: v3(3382.72,3513.77) 3399.9,3496.59 3420.48,3496.59 3425.04,3501.15 3430.79,3501.15 v3(3431.94,3502.3)
  Bottom Layer w6: MK1.1@3361.07,3526.56 MK1.1@3366.97,3526.56 ; MK1.1@3368.94,3526.56 3381.74,3513.77 v3(3382.72,3513.77) ; v3(3431.94,3502.3) 3469.22,3502.3 3478.65,3492.87 3478.65,3457.73 3487.39,3448.99 3548.33,3448.99 3560.05,3437.28 C30.2
NetC34_2: C34.2 R14.2 U5.3 | length 54.1
  Top Layer w6: C34.2 R14.2 4035.61,3414.69 U5.3
NetC35_2: C35.2 MK1.12 R15.2 | length 190.4
  Bottom Layer w6: MK1.12@3440.2,3526.56 3482.67,3526.56 3495.7,3539.59 3530,3539.59 3539.92,3529.67
  Bottom Layer w12: C35.2@3531.89,3477.11 3531.89,3521.64 3539.92,3529.67 3563.98,3529.67 R15.2
NetJ2_3: J2.3 R11.1 | length 141.2
  Top Layer w6: J2.3 3573.67,3542.18 3588.43,3552.15 3624.85,3545.94 3656.35,3531.7 R11.1
NetJ2_7: J2.7 R13.1 | length 113.9
  Top Layer w6: R13.1 3502.8,3611.21 3538.24,3575.78 J2.7
OSC: U1.C6 Y1.3 | length 117.7
  Top Layer w6: Y1.3 3927.83,3229.63 3921.79,3217.24 v1(3927.23,3201.45)
  Bottom Layer w6: v1(3927.23,3201.45) 3941.38,3194.54 3957.18,3199.98 U1.C6
RCVN: J3.1 U2.21 | length 527.4
  Top Layer w6: J3.1 3196.65,3513.76 3236.8,3513.76 v3(3248.87,3501.69)
  Bottom Layer w6: v3(3248.87,3501.69) 3250.4,3501.69 3266.72,3485.38 3287.48,3485.38 3373.08,3399.78 3477.37,3399.78 3536.28,3371.02 3589.22,3344.98 3615.01,3352.35 3629.45,3344.48 U2.21
RCVP: J3.2 U2.22 | length 542.4
  Top Layer w6: J3.2 3196.65,3468.39 3235.25,3468.39 v3(3248.87,3482.01) ; v1(3602.24,3333.07) 3607.13,3323.83 3629.55,3313.52 v1(3639.52,3318.65)
  Bottom Layer w6: v3(3248.87,3482.01) 3342.91,3387.97 3480.42,3383.69 3481.58,3383.12 3590.65,3329.9 3593.04,3329.9 3593.99,3330.23 v1(3602.24,3333.07) ; U2.22 U2.22@3648.05,3336.74
SCLK: U1.B1 U2.2 U3.13 | length 373.9
  Top Layer w6: U3.13 v1(3864.73,3468.47)
  Bottom Layer w6: U2.2 3881.32,3500.68 3890.79,3503.94 3919.1,3490.13 3924.54,3474.34 4034.23,3420.84 4054.17,3362.93 U1.B1
TCK: R10.2 TP6.1 U1.D3 | length 184.3
  Top Layer w6: v2(3970.64,3263.5) 3975.81,3274.12 3981.08,3275.93 3991.69,3270.75 4029.86,3283.89 4057.9,3339.55 4074.65,3346.25 ; v1(4082.53,3349.4) 4074.65,3346.25 ; TP6.1 4076.58,3351.56 4074.65,3346.25
TDI: R7.1 TP4.1 U1.A5 | length 191.9
  Top Layer w6: v1(4016.9,3214.66) 4028.98,3239.43 4076.36,3255.74 v1(4086.97,3250.56) 4099.05,3253.92 4123.87,3274.12 4134.69,3271.64 4139.61,3273.09 TP4.1
  Bottom Layer w6: U1.A5 4006.37,3211.03 v1(4016.9,3214.66) ; v1(4086.97,3250.56) R7.1
TDO: R6.1 TP3.1 U1.B4 | length 165.9
  Top Layer w6: v2(3992.04,3235.54) 4013.1,3242.79 4016.55,3249.87 4095.52,3277.06 v1(4099.05,3275.33) TP3.1
  Bottom Layer w6: v1(4099.05,3275.33) R6.1
TMS: R8.1 TP5.1 U1.C3 | length 149.6
  Top Layer w6: v2(3984.79,3256.6) 3988.33,3254.87 4091.38,3290.36 v1(4102.21,3313.96) 4100.84,3320.13 TP5.1@4103.2,3323.83
pads on no net: U1.A2 U1.A4 U1.B2 U1.B3 U1.B6 U1.C2 U1.C4 U1.D2 U1.D4 U1.D6 U1.E4 U1.E5 U2.6 U2.7 U2.25 U2.26 U2.35 U2.36 U2.37 U2.38 U3.2 U3.3 U3.4 U3.9 U3.10 U3.11 U4.5 U4.6

## Polygon pours and split planes (outlines as drawn)
+3V3_A on Inner 2 "+3V3_A_L03_P001" (solid, pour order 1): 3993.73,3472.51 3954.22,3499.28 3851.61,3549.33 3719.95,3598.22 3663.01,3612.2 3638.63,3545.26 3615.01,3505.89 3532.64,3348.92 3477.21,3376.51 3605.65,3314.49 3679.36,3339.86 3717.57,3321.22 3693.41,3271.68 3836.78,3201.76 3901.19,3333.81 3931.1,3344.11
+3V3_D on Inner 2 "+3V3_D_L03_P002" (solid, pour order 2): 4000.61,3468.66 4059.89,3435.03 4217.37,3234.24 4158.91,3114.66 4064.28,3089.51 3842.74,3198.85 3904.87,3326.24 3936.45,3337.12
+1V8 on Inner 2 "Inner 2-+1V8" (solid, pour order 3): 3441.78,3627.94 3441.78,3584.63 3422.09,3576.76 3390.6,3576.76 3374.85,3509.83 3374.85,3425.18 3525.32,3352.5 3613.55,3517.7 3634.36,3549.26 3661.85,3612.48 3595.32,3627.94
GND on Inner 1 "GND_L02_P000" (solid, pour order 0): 3374.85,3425.92 3374.85,3509.83 3391.19,3576.76 3422.09,3576.76 3441.78,3596.44 3441.78,3627.94 3596.9,3627.94 3729.18,3596.44 3855.2,3549.29 3957.53,3498.02 4059.89,3435.03 4217.37,3234.24 4130.75,3057.08

## Other copper
Bottom Layer:
  region net GND: 3449.06,3612.68 3427.41,3612.68 3427.41,3541.82 3449.06,3541.82
  region net GND: 3372.1,3612.63 3350.4,3612.74 3350.04,3541.87 3371.73,3541.76

## Silkscreen, mask and mechanical layers (free items; w line width, h text height)
Top Overlay:
  circle w5: c3914.47,3475.05 r14.89
  lines w5: 3909.29,3472.6 ccw(c3914.47,3475.05) 3913.22,3480.65
  lines w6: 4099.87,3253.39 cw(c4135.68,3222.15) 4135.68,3269.67
  text "3.7" at 3531.35,3621.05 h20 r90
  text "0" at 3641.58,3604.32 h20 r80
  text "2019" at 3891.58,3475.27 h20 r334
  text "TCK" at 4073.67,3355.3 h20 r65.35
  text "TMS" at 4102.21,3313.96 h20 r37.42
  text "TDO" at 4121.9,3287.39 h20 r37.89
  text "TDI" at 4086.46,3229.32 h20 r334
  text "3.7" at 4143.55,3199.7 h20 r64
  text "UCSD/OSP Mac Variant" at 3809.15,3173.4 h20 r334
  text "0" at 4116.24,3139.92 h20 r64
Bottom Overlay:
  text "McMaster University Wireless Systems / Research Group" at 3107.13,3510.81 h11.81
  text "DGTL BTE-" at 3440.79,3404.52 h20 r334
  text "RIC V2" at 3820.72,3219.48 h20 r334
  text "0 D+ D− 3.7" at 4091.39,3100.38 h20 r64
Mechanical 1:
  lines w2: 3424.68,3627.8 3425.83,3511.16 3390.18,3509.93 3390.6,3423.22 3428.42,3426.67 3479.92,3381.84 3705.51,3271.81 3989.78,3459.5 3857.3,3547.11 3726.48,3599.96 3567.25,3632.73
Board:
  lines w2.99: 3087.45,3409.86 3124.29,3373.02 3353.2,3373.02 4005.07,3060.03 4162.25,3060.03 4229.18,3198.81 4229.18,3226.37 4212.45,3245.07 cw(c4215.52,3270.64) 4189.94,3273.72 4067.76,3427.15 3990.75,3487.49 3777.07,3588.89 3597.17,3635.81 3087.45,3635.81 3087.45,3409.86
  lines w3: 3441.78,3600.38 3441.78,3600.38
Mechanical 15:
  lines w3.15: 3365.01,3511.8 3344.34,3512.26 3344.34,3621.64 3441.78,3621.64
  lines w3.54: 3542.36,3429.18 3600.24,3402.21 ; 3562.72,3453.34 3608.54,3431.71
  lines w3.94: 3481.64,3487.31 3507.8,3487.49 ; 3513.63,3456.68 3544.14,3456.68 3544.14,3467.65
  text "MK1" at 3309.5,3608.26 h12.13
  text "C25" at 3562.37,3483.63 h7.87 r336
  text "+" at 3506.74,3464.5 h19.68
  text "C35" at 3501.42,3440.71 h12.13
  text "+" at 3566.72,3424.78 h19.68 r337